# Altium PCB Eth_PHY_PCB (LAN8720A).PcbDoc
Units mil, origin at the board's own origin, x right, y up, seen from the top; angles counter-clockwise.
Board outline 748.03 x 1680.59 mil, 2 copper layers (Top Layer, Bottom Layer); 25 components, 0 nets, 89 pads, 26 vias.
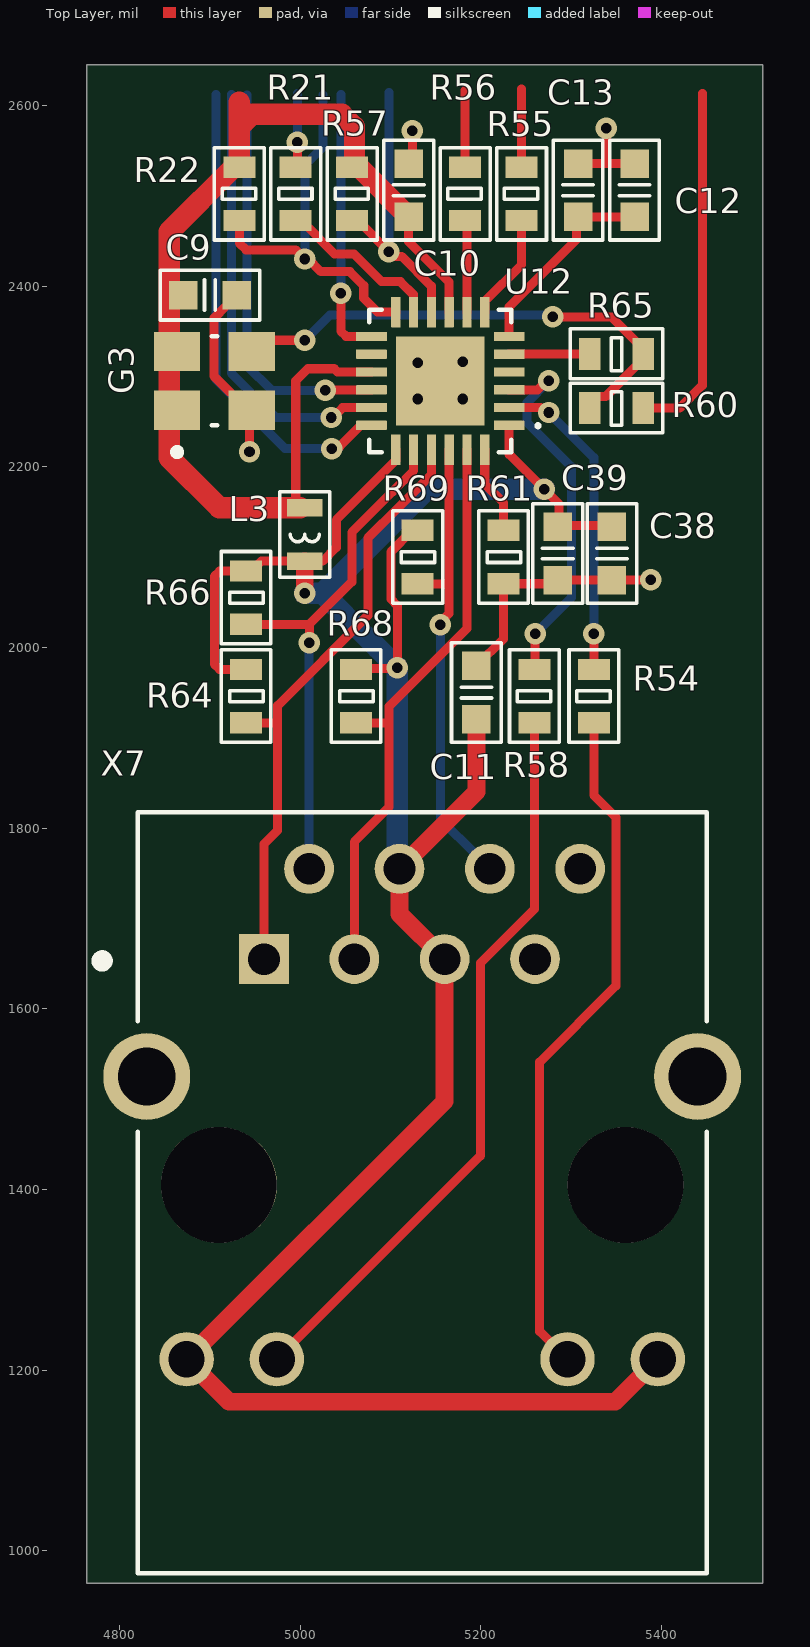
[diagram p0: Top Layer view]
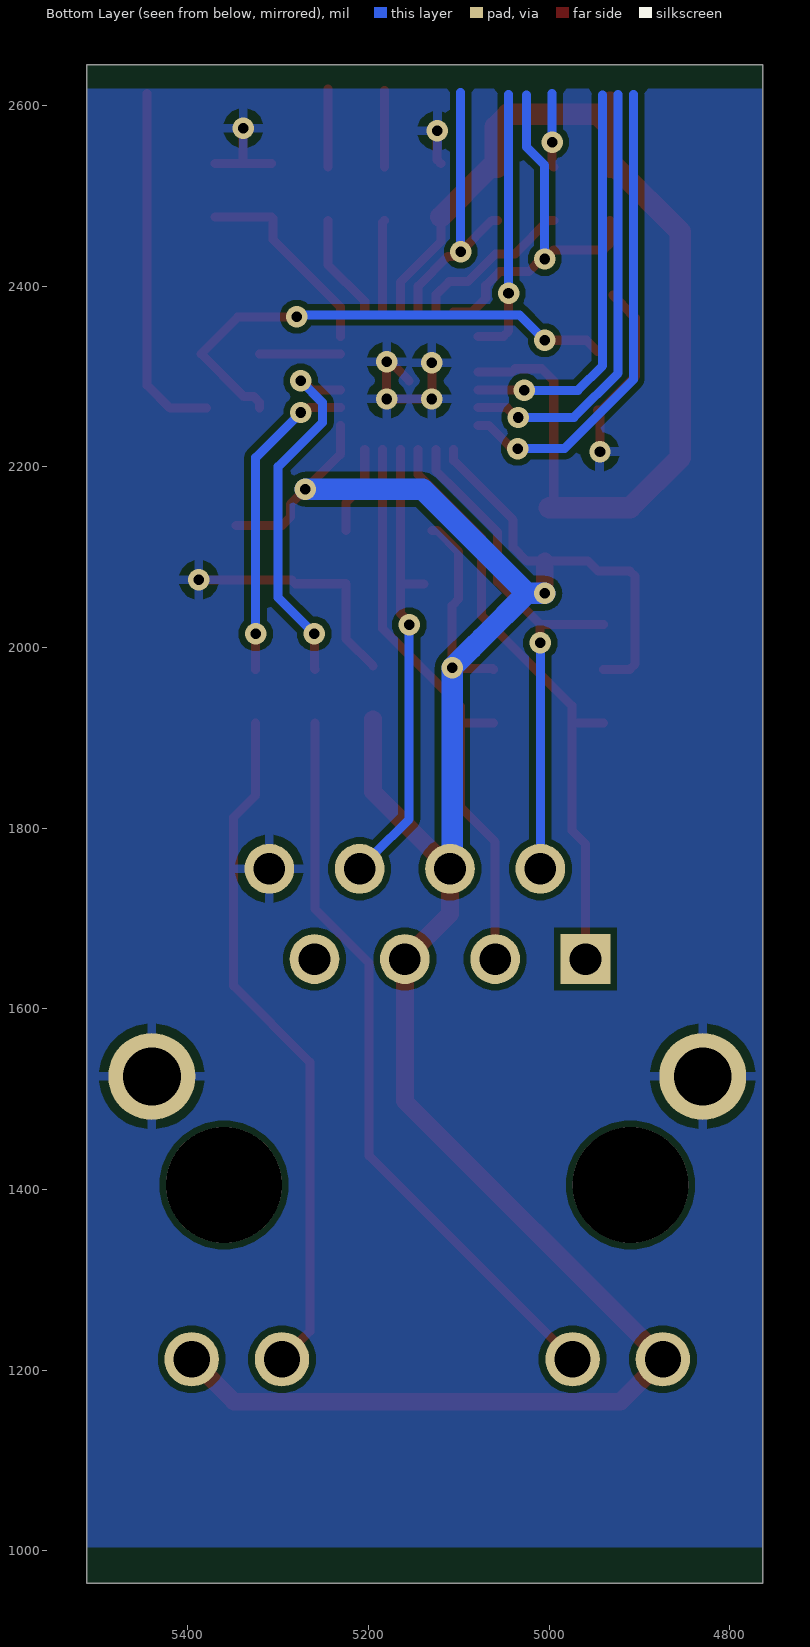
[diagram p1: Bottom Layer view, seen from below]

## Layer stack, top to bottom
Top Solder: solder mask 0.4, Solder Resist, Dk 3.5
Top Layer: signal copper 1.4
Dielectric 1: dielectric 12.6, FR-4, Dk 4.8
Bottom Layer: signal copper 1.4
Bottom Solder: solder mask 0.4, Solder Resist, Dk 3.5

## Board outline
4763.78,964.25 5511.81,964.25 5511.81,2644.84 4763.78,2644.84

## Design rules (kind name [scope] priority, off if disabled: settings)
Clearance [All] p1: gap=10 ignorepadtopadclearanceinfootprint=FALSE except(0: Arc-Hole Track-Hole SMDPad-Hole THPad-Hole Via-Hole Fill-Hole Poly-Hole Region-Hole Text-Hole)
PolygonConnect [All] p1: connectstyle=Relief reliefconductorwidth=10 reliefentries=4 polygonreliefangle="90 Angle" airgapwidth=10
RoutingVias [All] p1: holewidth=28 width=50 viastyle="Through Hole" minholewidth=28 minwidth=50 maxholewidth=28 maxwidth=50
SolderMaskExpansion [All] p1: expansion=4 istentingtop=FALSE
Width [All] p1: maxlimit=10 minlimit=10 preferedwidth=10
30 further rules are at their usual default settings.

## Components (designator, comment, footprint, x,y, rotation, side; value= is the part's Value field where it differs from the comment)
C9 "0.01uF" C_0603 4900,2390 r180 top
C10 "1uF" C_0603 5120,2506.06 r270 top
C11 "0.02uF" C_0603 5195,1950 r270 top
C12 "470pF" C_0603 5370,2506.06 r270 top
C13 "1uF" C_0603 5307.5,2506.06 r270 top
C38 "1uF" C_0603 5345,2103.94 r90 top
C39 "10uF" C_0603 5285,2103.94 r90 top
G3 "50MHz" XTAL_ASE-50.000MHZ-LR-T 4905,2295 r90 top
L3 "1uH" L_0603 5005,2125 r270 top
R21 "10" R_0603 4995,2502.13 r270 top
R22 "4.7k" R_0603 4932.5,2502.13 r270 top
R54 "330" R_0603 5325,1946.06 r270 top
R55 "10" R_0603 5245,2502.13 r270 top
R56 "10" R_0603 5182.5,2502.13 r270 top
R57 "1k" R_0603 5057.5,2502.13 r270 top
R58 "330" R_0603 5259.17,1946.06 r270 top
R60 "33" R_0603 5350,2265 r0 top
R61 "12.1k" R_0603 5225,2100 r90 top
R64 "49.9" R_0603 4940,1946.06 r90 top
R65 "33" R_0603 5350,2325 r0 top
R66 "49.9" R_0603 4940,2055 r90 top
R68 "49.9" R_0603 5061.67,1946.06 r90 top
R69 "49.9" R_0603 5130,2100 r90 top
U12 "LAN8720" QFN50P400X400X100-25N 5155,2295 r180 top
X7 "HR911105A" HR911105A_HANRUN 5135,1405 r180 top

## Footprints (in the part's own frame and the unit in brackets; to place one, negate y for a bottom-side part, rotate by r counter-clockwise, add the part's x,y. Pads: shape width x height; smd on the part's side, far side on the other; paste and mask are expansions set on the pad)
C_0603 [mm] "Chip Capacitor; Body 1.6 x 0.8 mm (LxW typ)"
  rect 0.8x0.8 smd: 1(-0.75,0) 2(0.75,0)
  silkscreen extent -1.4,-0.7 1.4,0.7, body extent -0.8,-0.4 0.8,0.4, height 0.3
HR911105A_HANRUN [mm]
  rect 1.398x1.398 hole 0.89: 1(4.45,-6.35)
  round 1.398 hole 0.89: 2(3.18,-8.89) 3(1.91,-6.35) 4(0.64,-8.89) 5(-0.63,-6.35) 6(-1.9,-8.89) 7(-3.17,-6.35) 8(-4.44,-8.89)
  round 1.53 hole 1.02: 9(6.625,4.9) 10(4.085,4.9) 11(-4.085,4.9) 12(-6.625,4.9)
  round 2.445 hole 1.63: 15(7.745,-3.05) 16(-7.745,-3.05)
  round 3.25 hole 3.25 unplated: ""(-5.715,0) ""(5.715,0)
  silkscreen extent -8,-10.48 9.15,10.92, body extent -8.02,-10.45 8.02,10.85, height 13.5
L_0603 [mm] "Inductor Pattern"
  rect 0.5x1 smd: 1(0.75,0) 2(-0.75,0)
  silkscreen extent -1.2,-0.7 1.2,0.7, body extent -0.8,-0.39 0.8,0.41, height 0.45
QFN50P400X400X100-25N [mm]
  rrect7% 0.86x0.26 smd: 1(-1.935,1.25) 2(-1.935,0.75) 3(-1.935,0.25) 4(-1.935,-0.25) 5(-1.935,-0.75) 6(-1.935,-1.25) 13(1.935,-1.25) 14(1.935,-0.75) 15(1.935,-0.25) 16(1.935,0.25) 17(1.935,0.75) 18(1.935,1.25)
  rrect7% 0.26x0.86 smd: 7(-1.25,-1.935) 8(-0.75,-1.935) 9(-0.25,-1.935) 10(0.25,-1.935) 11(0.75,-1.935) 12(1.25,-1.935) 19(1.25,1.935) 20(0.75,1.935) 21(0.25,1.935) 22(-0.25,1.935) 23(-0.75,1.935) 24(-1.25,1.935)
  rect 2.5x2.5 smd paste-2: 25(0,0)
  silkscreen extent -2.8,-2 2,2, body extent -2,-2 2,2, height 0.95
R_0603 [mm]
  rect 0.6x0.9 smd: 1(-0.75,0) 2(0.75,0)
  silkscreen extent -1.3,-0.7 1.3,0.7, body extent -0.8,-0.41 0.8,0.41, height 0.45
XTAL_ASE-50.000MHZ-LR-T [mm]
  rect 1.1x1.3 smd: 1(-0.825,1.05) 2(-0.825,-1.05) 3(0.825,-1.05) 4(0.825,1.05)
  silkscreen extent -2.1,-0.08 1.25,1.15, body extent -1.25,-1.61 1.25,1.61, height 0.81

## Part data
C9: library part CAP_SMD, "Capacitor", Part Number=CC0603KRX7R7BB103
C10 C13 C38: library part CAP_SMD, "Capacitor", Part Number=CC0603KRX7R9BB105
C11: library part CAP_SMD, "Capacitor", Part Number=CC0603KRX7R9BB223
C12: library part CAP_SMD, "Capacitor", Part Number=CC0603KRX7R9BB471
C39: library part CAP_SMD, "Capacitor", Part Number=CC0603KRX5R6BB106
G3: library part ASE, "Quartz Generator", Part=ASE-50.000MHZ-LR-T
L3: library part L_0603, "Inductor", Part Number=LQM18FN1R0M00D
R21 R55 R56: library part RES_SMD, "Resistor", Part Number=RC0603FR-0710R2L
R22: library part RES_SMD, "Resistor", Part Number=RC0603FR-134K7L
R54 R58: library part RES_SMD, "Resistor", Part Number=RC0603FR-07330KL
R57: library part RES_SMD, "Resistor", Part Number=RC0603FR-071KL
R60 R65: library part RES_SMD, "Resistor", Part Number=RC0603FR-0733RL
R61: library part RES_SMD, "Resistor"
R64 R66 R68 R69: library part RES_SMD, "Resistor", Part Number=RC0603FR-0749R9L
U12: "Phy Eth 2/2 Transceiver Full RMII 24-QFN-EP _4x4_", Package="QFN-24 Microchip", Availability=Unavailable, MF=Microchip, MP=LAN8720A-CP, Part Number=LAN8720, Price=None, SnapEDA_Link=https://www.snapeda.com/parts/LAN8720A-CP/Microchip/view-part/237160/?ref=snap
X7: "DIP RJ45 Connector;", Package=None, Availability=Unavailable, MP=HR911105A, Part Number=HR911105A, Price=None

## Via types
v1: diameter 23.62, hole 11.81, Top Layer to Bottom Layer, 26 vias

## Nets (pads, with @x,y where several pads share a name; then routed paths per layer and width w, separated by ;. In a path a pad name is that pad's centre, name@x,y a point inside that pad or via, vN(x,y) a via of type N, cw(c..) or ccw(c..) an arc to the next point about the centre after c; other vN are vias at no path point)
pads on no net: C9.1 C9.2 C10.1 C10.2 C11.1 C11.2 C12.1 C12.2 C13.1 C13.2 C38.1 C38.2 C39.1 C39.2 G3.1 G3.2 G3.3 G3.4 L3.1 L3.2 R21.1 R21.2 R22.1 R22.2 R54.1 R54.2 R55.1 R55.2 R56.1 R56.2 R57.1 R57.2 R58.1 R58.2 R60.1 R60.2 R61.1 R61.2 R64.1 R64.2 R65.1 R65.2 R66.1 R66.2 R68.1 R68.2 R69.1 R69.2 U12.1 U12.2 U12.3 U12.4 U12.5 U12.6 U12.7 U12.8 U12.9 U12.10 U12.11 U12.12 U12.13 U12.14 U12.15 U12.16 U12.17 U12.18 U12.19 U12.20 U12.21 U12.22 U12.23 U12.24 U12.25 X7. X7.1 X7.2 X7.3 X7.4 X7.5 X7.6 X7.7 X7.8 X7.9 X7.10 X7.11 X7.12 X7.15 X7.16
copper on no net: | length 14290.6
  Top Layer w10: 4929.53,2390 4918.78,2379.25 4918.78,2378.63 4904.53,2364.38 4904.53,2300.39 4942.4,2262.52 4946.34,2262.52 4943.9,2260.08 v1(4943.9,2216.54) ; 4932.5,2472.6 4932.5,2447.5 4940,2440 4995,2440 v1(5005,2430) 5008.69,2430 5022.78,2415.91 5054.9,2415.91 5070.28,2400.52 5070.28,2386.57 5085.67,2371.18 5105.79,2371.18 ; 4940,1916.54 4973.46,1916.54 4975,1915 ; 4940,1975.59 4910.86,1975.59 4905,1981.45 4905,2078.67 4910.86,2084.53 4945.91,2084.53 4956.85,2095.47 5005,2095.47 5024.84,2095.47 5040,2110.63 5040,2141.22 5105.79,2207.01 5105.79,2218.82 ; 4940,2025.47 5010,2025.47 ; 4946.34,2327.48 4958.86,2340 v1(5005,2340) ; 4959.8,1655 4960,1655.2 4960,1782.5 4975,1797.5 4975,1915 ; 4974.17,1212.09 5199.41,1437.32 5199.41,1650.62 5259.17,1710.38 5259.17,1916.54 ; 4995,2472.6 5000.91,2472.6 5038.11,2435.39 5059.57,2435.39 5089.97,2405 5110.9,2405 5125.35,2390.54 5125.35,2383.11 5125.47,2382.99 5125.47,2371.18 ; 4995,2531.65 4996.81,2533.46 v1(4996.81,2559.29) ; 5005,2154.53 4999.84,2154.53 4995,2159.37 4995,2295 5008.46,2308.46 5037.65,2308.46 5041.26,2304.84 5078.82,2304.84 ; v1(5010,2005) 5010,2025.47 ; v1(5027.75,2284.56) 5028.34,2285.16 5078.82,2285.16 ; v1(5034.23,2254.55) 5035.97,2254.55 5046.89,2265.47 5078.82,2265.47 ; v1(5035,2219.98) 5037.61,2222.59 5043.81,2222.59 5067.01,2245.79 5078.82,2245.79 ; v1(5045,2392.01) 5045,2350.07 5050.86,2344.21 5078.82,2344.21 ; 5057.5,2472.6 5063.41,2472.6 v1(5098,2438) 5103.12,2432.89 5112.11,2432.89 5145.04,2399.96 5145.04,2371.3 5145.16,2371.18 ; 5059.8,1655 5059.8,1784.8 5098.46,1823.46 5098.46,1920 5098.46,1934.67 5184.53,2020.73 5184.53,2218.82 ; 5061.67,1916.54 5098.46,1916.54 ; 5061.67,1975.59 5062.62,1976.55 5106.55,1976.55 v1(5107.5,1977.5) 5107.5,2046.35 5100.2,2053.66 5100.2,2105.63 5124.09,2129.53 5130,2129.53 ; 5120,2476.54 5120,2449.16 5164.84,2404.32 5164.84,2371.18 ; 5120,2535.59 5124.02,2539.61 v1(5124.02,2571.85) ; 5125.46,2218.81 5125.46,2195.78 5101.89,2172.2 5057.09,2127.4 5057.09,2072.56 5010,2025.47 ; v1(5130,2315) v1(5130,2275) v1(5180,2275) v1(5180,2316.1) 5176.1,2316.1 5155,2295 ; 5138.74,2070 5164.84,2070 ; 5145.16,2218.82 5145.16,2191.31 5108.85,2155 5075,2121.15 5075,2035.54 4975,1935.54 4975,1915 ; v1(5155,2025) 5155,2027.83 5164.84,2037.67 5164.84,2070 ; 5164.84,2218.82 5164.84,2070 ; 5182.5,2472.6 5184.53,2470.57 5184.53,2371.18 ; 5182.5,2531.65 5182.5,2616.56 ; 5195,1979.53 5225,2009.53 5225,2070.47 5281.06,2070.47 5285,2074.41 5345,2074.41 5345.39,2074.8 v1(5387.8,2074.8) ; 5204.21,2218.82 5204.21,2180.79 5225,2160 5225,2129.53 ; 5204.21,2371.18 5204.21,2382.99 5245,2423.78 5245,2472.6 ; 5231.18,2245.79 5231.18,2213.82 v1(5270,2175) 5286.65,2158.35 5286.65,2144.1 5295.75,2135 5346.53,2135 ; 5231.18,2265.47 5265.84,2265.47 5271.31,2260 v1(5275,2260) ; 5231.18,2285.16 5262.85,2285.16 5272.69,2295 v1(5275,2295) ; 5231.18,2324.53 5242.99,2324.53 5243.46,2325 5320.47,2325 ; 5231.18,2344.21 5231.18,2376.85 5305.98,2451.65 5305.98,2475.01 5307.5,2476.54 5370,2476.54 ; 5245,2531.65 5245,2618.11 ; 5259.17,1975.59 5260,1976.42 v1(5260,2015) ; v1(5279.53,2366.14) 5280.17,2365.5 5344.93,2365.5 5385.43,2325 5338.15,2277.72 5327.28,2277.72 5320.47,2270.91 5320.47,2265 ; 5295.83,1212.09 5265,1242.91 5265,1541.05 5349.41,1625.46 5349.41,1811.95 5325,1836.36 5325,1916.54 ; 5307.5,2535.59 5338.75,2535.59 ; 5325,1975.59 v1(5325,2015) ; v1(5338.58,2574.8) 5338.75,2574.64 5338.75,2535.59 ; 5370,2535.59 5338.75,2535.59 ; 5379.53,2265 5420,2265 5445,2290 5445,2613.19
  Top Layer w19.68: v1(5005,2060) 5005,2095.47 ; 5195,1920.47 5195,1840.2 5109.8,1755 5109.8,1705 5159.8,1655 5159.8,1497.72 4874.17,1212.09 4921.22,1165.04 5348.78,1165.04 5395.83,1212.09
  Top Layer w23.62: 4932.5,2603.35 4932.5,2576.16 ; 4999.84,2154.53 4910.47,2154.53 4855,2210 4855,2327.48 4855,2460.06 4926.59,2531.65 4932.5,2531.65 4932.5,2576.16 ; 5057.5,2531.65 5060,2531.65 ; 5120,2476.54 5064.88,2531.65 5060,2531.65 ; 4932.5,2576.16 4946.34,2590 5046.16,2590 5060,2576.16 5060,2531.65
  Bottom Layer w10: 4906.77,2612.2 4906.77,2296.43 4983.22,2219.98 v1(5035,2219.98) ; 4923.86,2612.23 4923.86,2303.5 4972.81,2254.55 v1(5034.23,2254.55) ; 4940.94,2611.22 4940.94,2312.01 4968.39,2284.56 v1(5027.75,2284.56) ; v1(4996.81,2559.29) 4996.81,2613.19 ; v1(5005,2340) 5033.11,2368.11 5277.56,2368.11 v1(5279.53,2366.14) ; v1(5005,2430) 5005,2533.68 5025,2553.68 5025,2611.22 ; 5009.8,1755 5009.9,1755.1 5009.9,2004.9 v1(5010,2005) ; v1(5045,2392.01) 5045,2612.2 ; v1(5098,2438) 5098,2614.17 ; v1(5155,2025) 5155,1810 5195.19,1769.81 5195.19,1750.19 ; v1(5260,2015) 5300,2055 5300,2200 5251.1,2248.9 5251.1,2271.1 v1(5275,2295) ; v1(5275,2260) 5325,2210 v1(5325,2015)
  Bottom Layer w23.62: v1(5005,2060) 5025,2060 ; 5109.8,1755 5107.5,1757.3 v1(5107.5,1977.5) 5085.79,1999.21 5075,2010 5025,2060 ; v1(5270,2175) 5140,2175 5025,2060

## Polygon pours and split planes (outlines as drawn)
no net on Bottom Layer "NONET_L02_P000" (solid, pour order 0): 4763.78,1003.94 5511.81,1003.94 5511.81,2618.11 4763.78,2618.11